# Altium PCB BearlyML Carrier Arty Board.pcbdoc
Units mil, origin at the board's own origin, x right, y up, seen from the top; angles counter-clockwise.
Board outline 7614.16 x 3519.68 mil, 4 copper layers (Top Layer, Mid-Layer 1, Mid-Layer 2, Bottom Layer); 42 components, 72 nets, 458 pads, 129 vias.
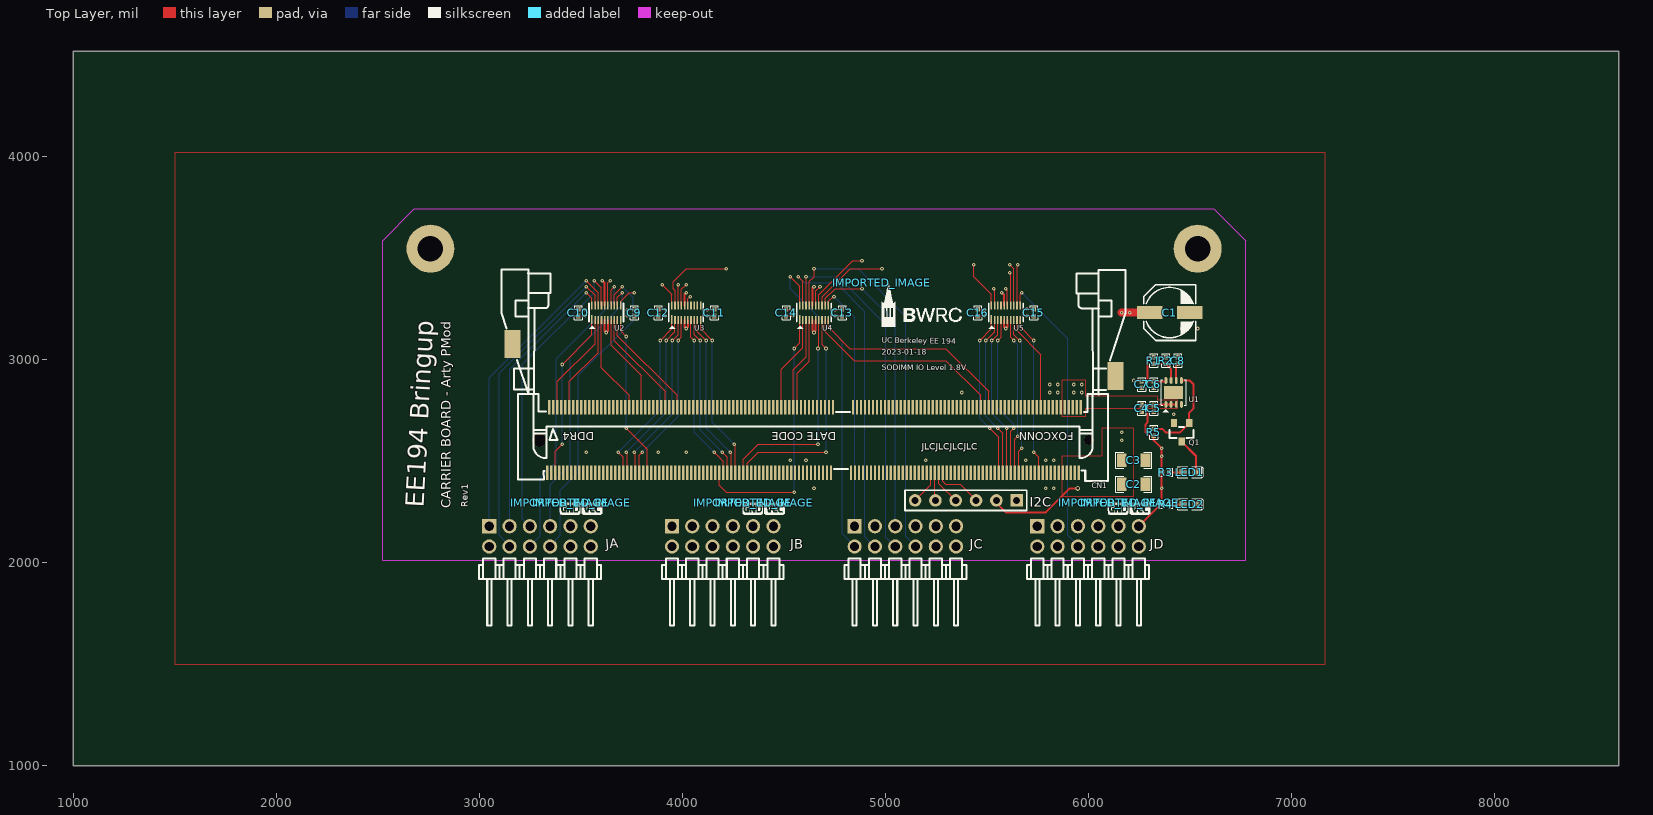
[diagram p0: Top Layer view]
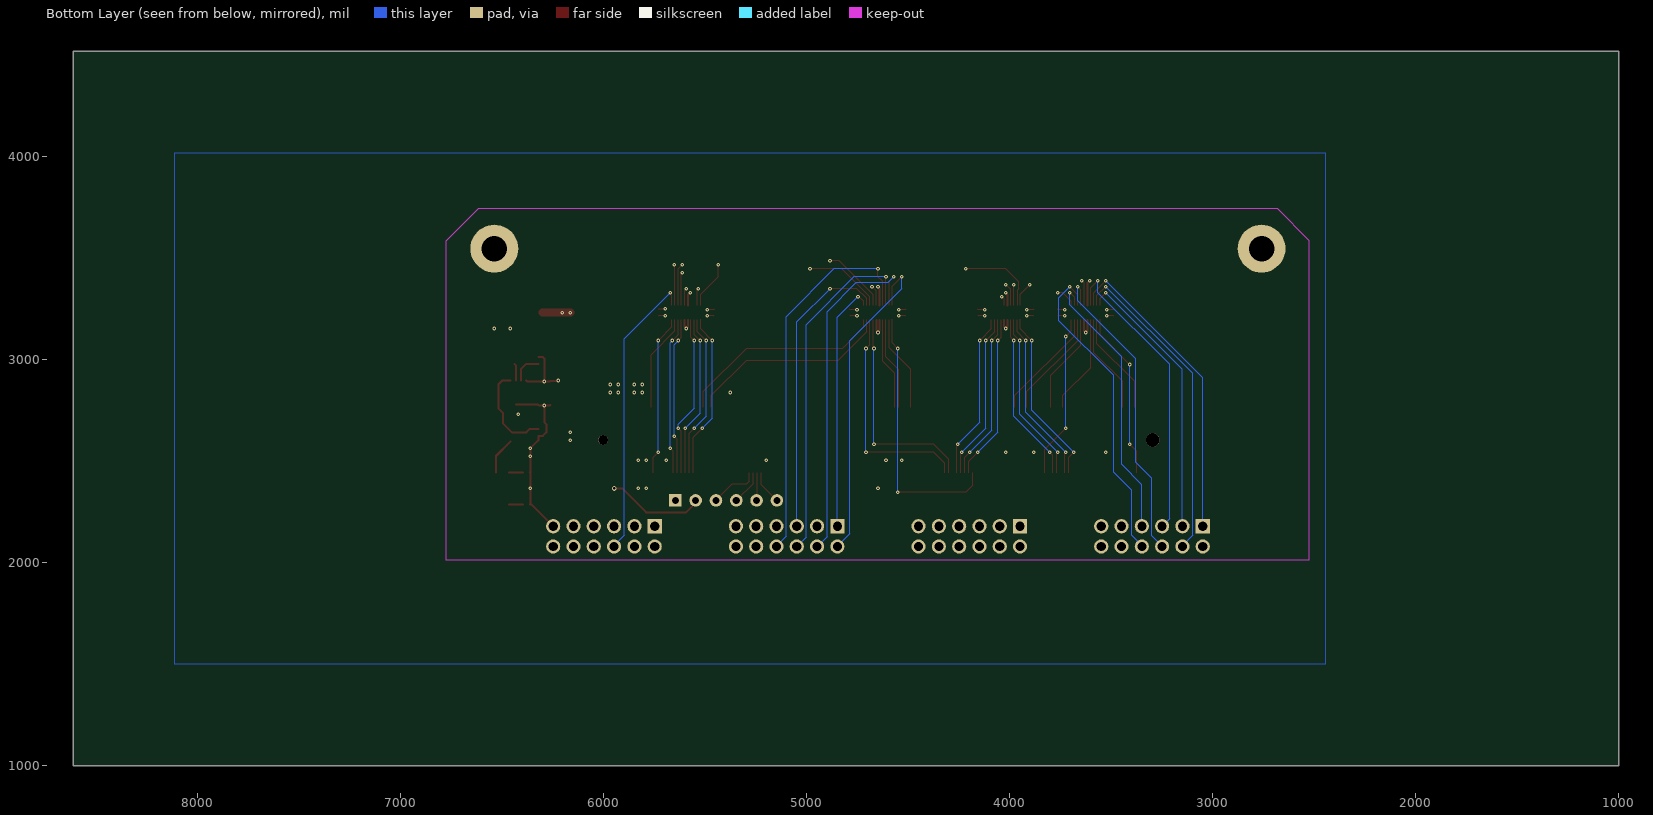
[diagram p1: Bottom Layer view, seen from below]
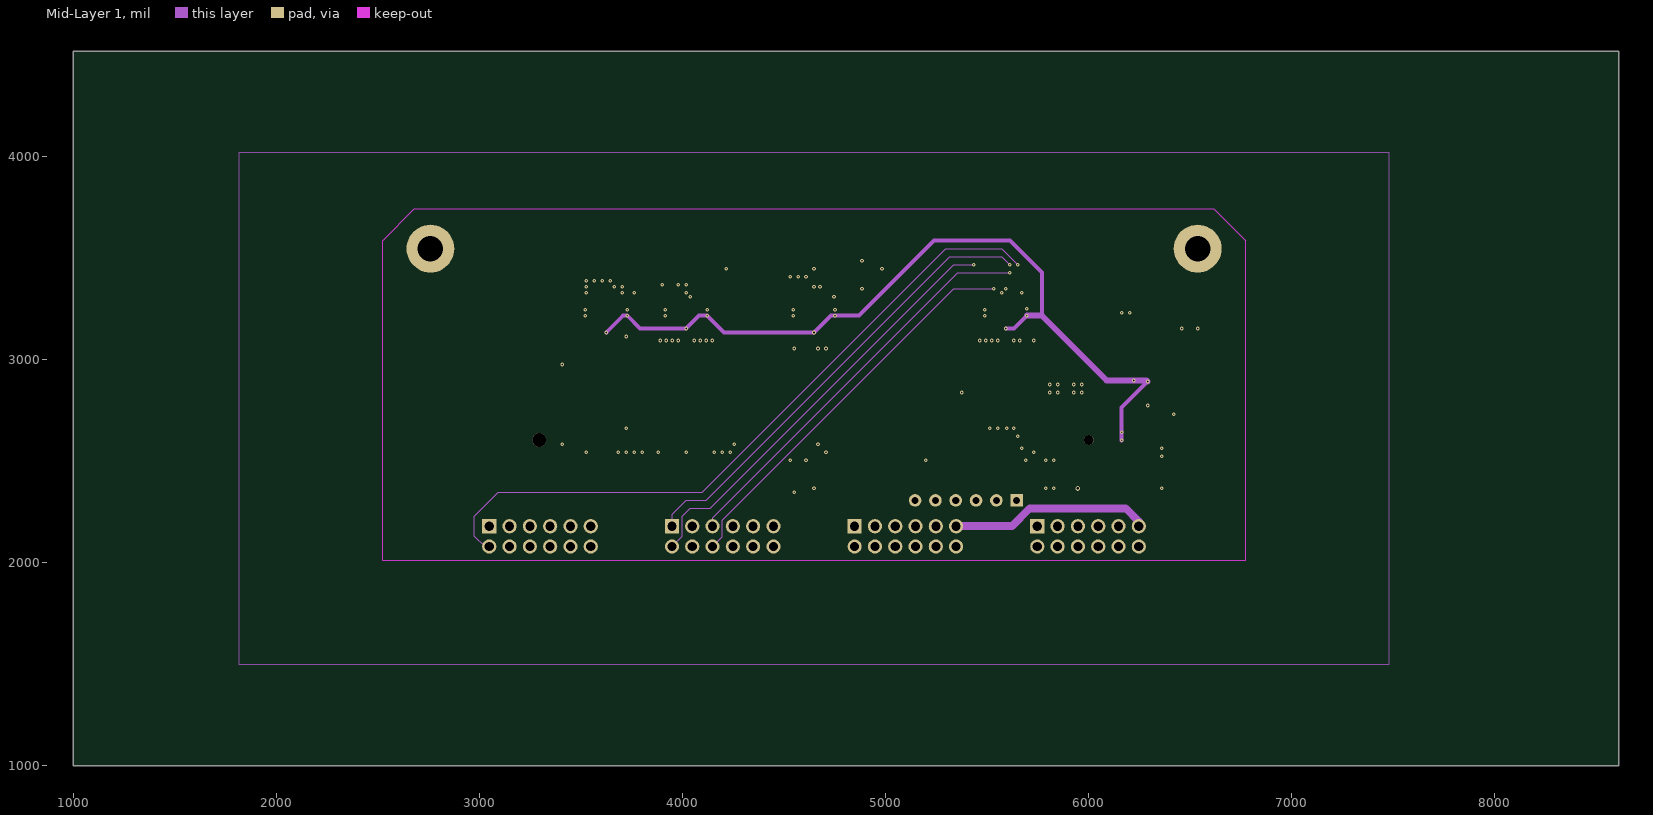
[diagram p2: Mid-Layer 1]
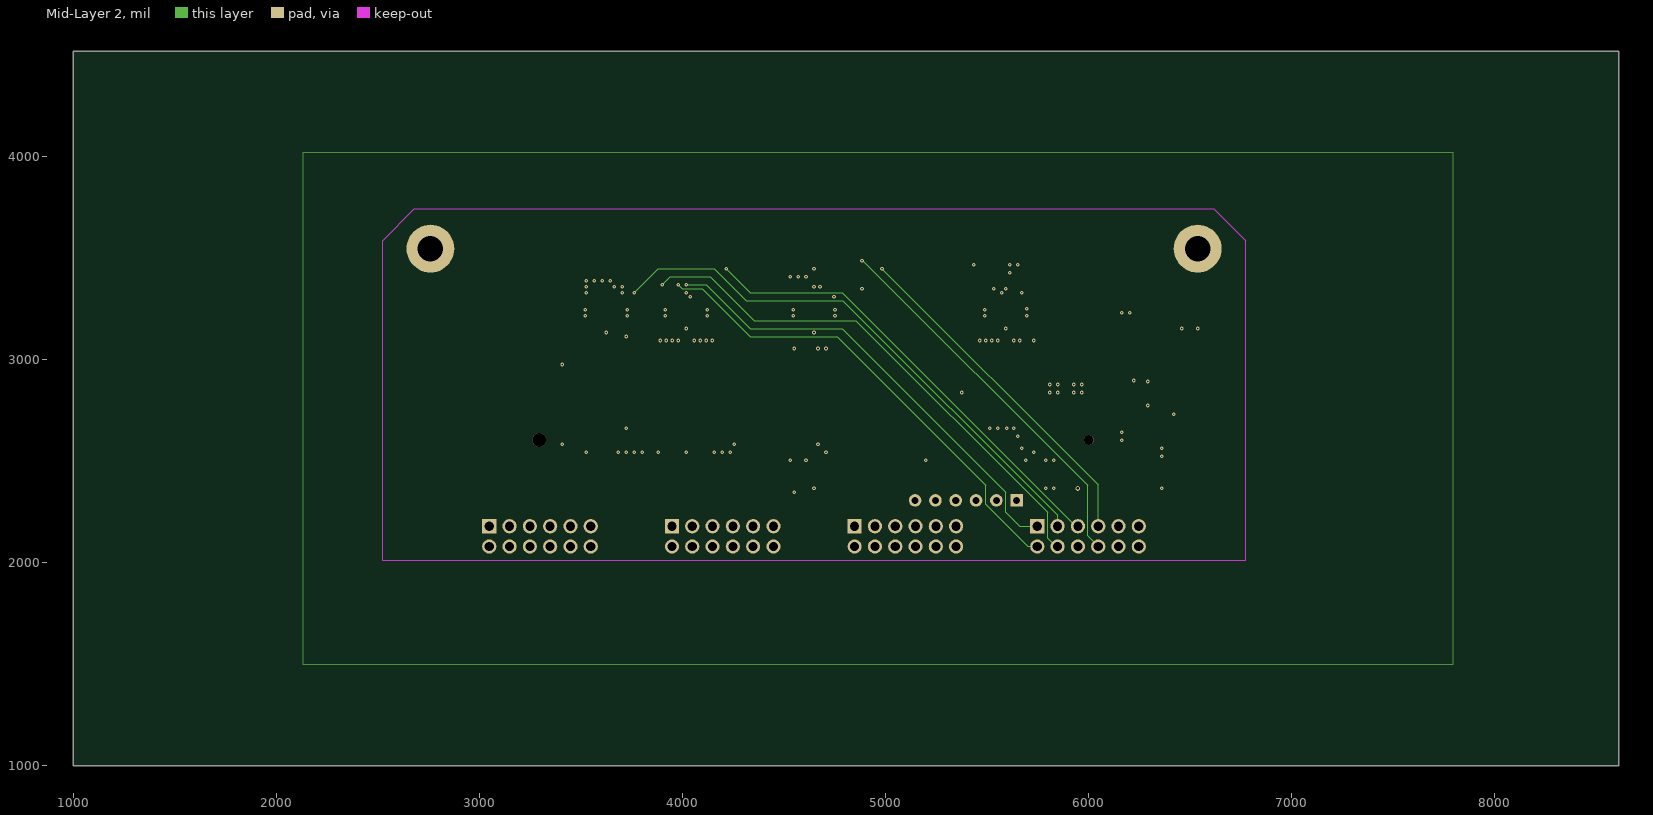
[diagram p3: Mid-Layer 2]

## Layer stack, top to bottom
Top Solder: solder mask 0.4, Solder Resist, Dk 3.5
Top Layer: signal copper 1.4
Dielectric1: dielectric 12.6, FR-4, Dk 4.8
Mid-Layer 1: signal copper 1.4
Dielectric3: dielectric 12.6, FR-4, Dk 4.8
Mid-Layer 2: signal copper 1.4
Dielectric2: dielectric 12.6, FR-4, Dk 4.8
Bottom Layer: signal copper 1.4
Bottom Solder: solder mask 0.4, Solder Resist, Dk 3.5

## Board outline
8614.16,1000 1000,1000 1000,4519.68 8614.16,4519.68

## Design rules (kind name [scope] priority, off if disabled: settings)
Clearance [All] p1: gap=10 ignorepadtopadclearanceinfootprint=FALSE except(0: Arc-Hole Track-Hole SMDPad-Hole THPad-Hole Via-Hole Fill-Hole Poly-Hole Region-Hole Text-Hole)
PolygonConnect [All] p1: connectstyle=Relief reliefconductorwidth=10 reliefentries=4 polygonreliefangle="90 Angle" airgapwidth=10
RoutingVias [All] p1: holewidth=28 width=50 viastyle="Through Hole" minholewidth=28 minwidth=50 maxholewidth=28 maxwidth=50
SolderMaskExpansion [All] p1: expansion=4 istentingtop=FALSE
Width [All] p1: maxlimit=10 minlimit=10 preferedwidth=10
30 further rules are at their usual default settings.

## Components (designator, comment, footprint, x,y, rotation, side; value= is the part's Value field where it differs from the comment)
C1 "220u" CAPPR5.0-D6.3_L6.6_W6.6 6401.6,3232.32 r180 top
C2 "22u" CAPA-1206 6224.4,2385.82 r180 top
C3 "22u" CAPA-1206 6224.4,2503.92 r180 top
C4 "10u" CAPA-0402 6263.8,2759.82 r90 top
C5 "100n" CAPA-0402 6322.8,2759.82 r90 top
C6 "100n" CAPA-0402 6322.8,2877.92 r90 top
C7 "10u" CAPA-0402 6263.8,2877.92 r90 top
C8 "1n" CAPA-0402 6440.9,2996.02 r270 top
C9 "100n" CAPA-0402 3763.8,3232.32 r270 top
C10 "100n" CAPA-0402 3488.2,3232.32 r90 top
C11 "100n" CAPA-0402 4157.5,3232.32 r270 top
C12 "100n" CAPA-0402 3881.9,3232.32 r90 top
C13 "100n" CAPA-0402 4787.4,3232.28 r270 top
C14 "100n" CAPA-0402 4511.81,3232.28 r90 top
C15 "100n" CAPA-0402 5732.27,3232.28 r270 top
C16 "100n" CAPA-0402 5456.69,3232.28 r90 top
CN1 "ASAA826-E8SB0-7H" CONN-SMD_ASAA826-E8SB0-7H 4649.58,2759.86 r180 top
I2C "HDR-M-2.54_1x6" HDR-M-2.54_1X6 5397.63,2307.09 r180 top
IMPORTED_IMAGE "Comment" IMPORTED_IMAGE 4984.25,3379.91 r0 top
IMPORTED_IMAGE "Comment" IMPORTED_IMAGE 3397.71,2295.02 r0 top
IMPORTED_IMAGE "Comment" IMPORTED_IMAGE 3504.79,2294.58 r0 top
IMPORTED_IMAGE "Comment" IMPORTED_IMAGE 4297.71,2295.02 r0 top
IMPORTED_IMAGE "Comment" IMPORTED_IMAGE 4404.79,2294.58 r0 top
IMPORTED_IMAGE "Comment" IMPORTED_IMAGE 6097.71,2295.02 r0 top
IMPORTED_IMAGE "Comment" IMPORTED_IMAGE 6204.79,2294.58 r0 top
JA "A2541WR-2X6P" CONN-TH_A2541WR-2X6P 3299.6,2129.72 r180 top
JB "A2541WR-2X6P" CONN-TH_A2541WR-2X6P 4199.6,2129.72 r180 top
JC "A2541WR-2X6P" CONN-TH_A2541WR-2X6P 5099.6,2129.72 r180 top
JD "A2541WR-2X6P" CONN-TH_A2541WR-2X6P 5999.6,2129.72 r180 top
LED1 "LED-0603_R" LED-0603 6499.99,2444.88 r0 top
LED2 "LED-0603_R" LED-0603 6499.99,2287.4 r0 top
Q1 "FDV301N" SOT-23_L2.9-W1.3-P1.90-LS2.4-BR 6460.62,2641.73 r90 top
R1 "160k" RES-0402 6322.8,2996.02 r90 top
R2 "47k" RES-0402 6381.9,2996.02 r270 top
R3 "2k" RES-0402 6381.9,2444.92 r180 top
R4 "2k" RES-0402 6381.9,2287.42 r180 top
R5 "10k" RES-0402 6322.8,2641.72 r270 top
U1 "MCP1726-ADJE/MF" TDFN-8_L3.0-W3.0-P0.65-BL-EP 6421.3,2838.62 r0 top
U2 "TXB0108DQSR" SON-20_L4.0-W2.0-P0.40-BL 3625.97,3232.26 r0 top
U3 "TXB0108DQSR" SON-20_L4.0-W2.0-P0.40-BL 4019.66,3232.26 r0 top
U4 "TXB0108DQSR" SON-20_L4.0-W2.0-P0.40-BL 4649.56,3232.26 r0 top
U5 "TXB0108DQSR" SON-20_L4.0-W2.0-P0.40-BL 5594.47,3232.26 r0 top

## Footprints (in the part's own frame and the unit in brackets; to place one, negate y for a bottom-side part, rotate by r counter-clockwise, add the part's x,y. Pads: shape width x height; smd on the part's side, far side on the other; paste and mask are expansions set on the pad)
CAPA-0402 [mm]
  rect 0.566x0.54 smd paste-100 mask+0.051: 1(-0.433,0) 2(0.433,0)
  silkscreen extent -0.87,-0.5 0.87,0.5
CAPA-1206 [mil]
  rect 47.54x66.97 smd paste-3937.01 mask+2: 1(-58.22,0) 2(58.22,0)
  silkscreen extent -89,-39 89,39
CAPPR5.0-D6.3_L6.6_W6.6 [mm]
  rect 3.2x1.6 smd paste+0 mask+0.102: 1(2.5,0) 2(-2.5,0)
  silkscreen extent -3.25,-3.5 3.25,3.5
CONN-SMD_ASAA826-E8SB0-7H [mm]
  rect 0.3x1.8 smd paste+0 mask+0.051: 1(33.375,8.05) 2(33.125,-0.15) 3(32.875,8.05) 4(32.625,-0.15) 5(32.375,8.05) 6(32.125,-0.15) 7(31.875,8.05) 8(31.625,-0.15) 9(31.375,8.05) 10(31.125,-0.15) 11(30.875,8.05) 12(30.625,-0.15) 13(30.375,8.05) 14(30.125,-0.15) 15(29.875,8.05) 16(29.625,-0.15) 17(29.375,8.05) 18(29.125,-0.15) 19(28.875,8.05) 20(28.625,-0.15) 21(28.375,8.05) 22(28.125,-0.15) 23(27.875,8.05) 24(27.625,-0.15) 25(27.375,8.05) 26(27.125,-0.15) 27(26.875,8.05) 28(26.625,-0.15) 29(26.375,8.05) 30(26.125,-0.15) 31(25.875,8.05) 32(25.625,-0.15) 33(25.375,8.05) 34(25.125,-0.15) 35(24.875,8.05) 36(24.625,-0.15) 37(24.375,8.05) 38(24.125,-0.15) 39(23.875,8.05) 40(23.625,-0.15) 41(23.375,8.05) 42(23.125,-0.15) 43(22.875,8.05) 44(22.625,-0.15) 45(22.375,8.05) 46(22.125,-0.15) 47(21.875,8.05) 48(21.625,-0.15) 49(21.375,8.05) 50(21.125,-0.15) 51(20.875,8.05) 52(20.625,-0.15) 53(20.375,8.05) 54(20.125,-0.15) 55(19.875,8.05) 56(19.625,-0.15) 57(19.375,8.05) 58(19.125,-0.15) 59(18.875,8.05) 60(18.625,-0.15) 61(18.375,8.05) 62(18.125,-0.15) 63(17.875,8.05) 64(17.625,-0.15) 65(17.375,8.05) 66(17.125,-0.15) 67(16.875,8.05) 68(16.625,-0.15) 69(16.375,8.05) 70(16.125,-0.15) 71(15.875,8.05) 72(15.625,-0.15) 73(15.375,8.05) 74(15.125,-0.15) 75(14.875,8.05) 76(14.625,-0.15) 77(14.375,8.05) 78(14.125,-0.15) 79(13.875,8.05) 80(13.625,-0.15) 81(13.375,8.05) 82(13.125,-0.15) 83(12.875,8.05) 84(12.625,-0.15) 85(12.375,8.05) 86(12.125,-0.15) 87(11.875,8.05) 88(11.625,-0.15) 89(11.375,8.05) 90(11.125,-0.15) 91(10.875,8.05) 92(10.625,-0.15) 93(10.375,8.05) 94(10.125,-0.15) 95(9.875,8.05) 96(9.625,-0.15) 97(9.375,8.05) 98(9.125,-0.15) 99(8.875,8.05) 100(8.625,-0.15) 101(8.375,8.05) 102(8.125,-0.15) 103(7.875,8.05) 104(7.625,-0.15) 105(7.375,8.05) 106(7.125,-0.15) 107(6.875,8.05) 108(6.625,-0.15) 109(6.375,8.05) 110(6.125,-0.15) 111(5.875,8.05) 112(5.625,-0.15) 113(5.375,8.05) 114(5.125,-0.15) 115(4.875,8.05) 116(4.625,-0.15) 117(4.375,8.05) 118(4.125,-0.15) 119(3.875,8.05) 120(3.625,-0.15) 121(3.375,8.05) 122(3.125,-0.15) 123(2.875,8.05) 124(2.625,-0.15) 125(2.375,8.05) 126(2.125,-0.15) 127(1.875,8.05) 128(1.625,-0.15) 129(1.375,8.05) 130(1.125,-0.15) 131(0.875,8.05) 132(0.625,-0.15) 133(0.375,8.05) 134(0.125,-0.15) 135(-0.125,8.05) 136(-0.375,-0.15) 137(-0.625,8.05) 138(-0.875,-0.15) 139(-1.125,8.05) 140(-1.375,-0.15) 141(-1.625,8.05) 142(-1.875,-0.15) 143(-2.125,8.05) 144(-2.375,-0.15) 145(-4.625,8.05) 146(-4.875,-0.15) 147(-5.125,8.05) 148(-5.375,-0.15) 149(-5.625,8.05) 150(-5.875,-0.15) 151(-6.125,8.05) 152(-6.375,-0.15) 153(-6.625,8.05) 154(-6.875,-0.15) 155(-7.125,8.05) 156(-7.375,-0.15) 157(-7.625,8.05) 158(-7.875,-0.15) 159(-8.125,8.05) 160(-8.375,-0.15) 161(-8.625,8.05) 162(-8.875,-0.15) 163(-9.125,8.05) 164(-9.375,-0.15) 165(-9.625,8.05) 166(-9.875,-0.15) 167(-10.125,8.05) 168(-10.375,-0.15) 169(-10.625,8.05) 170(-10.875,-0.15) 171(-11.125,8.05) 172(-11.375,-0.15) 173(-11.625,8.05) 174(-11.875,-0.15) 175(-12.125,8.05) 176(-12.375,-0.15) 177(-12.625,8.05) 178(-12.875,-0.15) 179(-13.125,8.05) 180(-13.375,-0.15) 181(-13.625,8.05) 182(-13.875,-0.15) 183(-14.125,8.05) 184(-14.375,-0.15) 185(-14.625,8.05) 186(-14.875,-0.15) 187(-15.125,8.05) 188(-15.375,-0.15) 189(-15.625,8.05) 190(-15.875,-0.15) 191(-16.125,8.05) 192(-16.375,-0.15) 193(-16.625,8.05) 194(-16.875,-0.15) 195(-17.125,8.05) 196(-17.375,-0.15) 197(-17.625,8.05) 198(-17.875,-0.15) 199(-18.125,8.05) 200(-18.375,-0.15) 201(-18.625,8.05) 202(-18.875,-0.15) 203(-19.125,8.05) 204(-19.375,-0.15) 205(-19.625,8.05) 206(-19.875,-0.15) 207(-20.125,8.05) 208(-20.375,-0.15) 209(-20.625,8.05) 210(-20.875,-0.15) 211(-21.125,8.05) 212(-21.375,-0.15) 213(-21.625,8.05) 214(-21.875,-0.15) 215(-22.125,8.05) 216(-22.375,-0.15) 217(-22.625,8.05) 218(-22.875,-0.15) 219(-23.125,8.05) 220(-23.375,-0.15) 221(-23.625,8.05) 222(-23.875,-0.15) 223(-24.125,8.05) 224(-24.375,-0.15) 225(-24.625,8.05) 226(-24.875,-0.15) 227(-25.125,8.05) 228(-25.375,-0.15) 229(-25.625,8.05) 230(-25.875,-0.15) 231(-26.125,8.05) 232(-26.375,-0.15) 233(-26.625,8.05) 234(-26.875,-0.15) 235(-27.125,8.05) 236(-27.375,-0.15) 237(-27.625,8.05) 238(-27.875,-0.15) 239(-28.125,8.05) 240(-28.375,-0.15) 241(-28.625,8.05) 242(-28.875,-0.15) 243(-29.125,8.05) 244(-29.375,-0.15) 245(-29.625,8.05) 246(-29.875,-0.15) 247(-30.125,8.05) 248(-30.375,-0.15) 249(-30.625,8.05) 250(-30.875,-0.15) 251(-31.125,8.05) 252(-31.375,-0.15) 253(-31.625,8.05) 254(-31.875,-0.15) 255(-32.125,8.05) 256(-32.375,-0.15) 257(-32.625,8.05) 258(-32.875,-0.15) 259(-33.125,8.05) 260(-33.375,-0.15)
  rect 2x3.5 smd paste+0 mask+0.051: 261(37.75,-8.05) 262(-37.75,-4.05)
  round 1.2 hole 1.2 unplated paste+0: ""(-34.4,3.95)
  round 1.7 hole 1.7 unplated paste+0: ""(34.4,3.95)
  silkscreen extent -38.98,-17.38 39.11,9.05
CONN-TH_A2541WR-2X6P [mil]
  rect 70x70 hole 45 paste+0 mask+2: 1(250,-50)
  round 70 hole 45 paste+0 mask+2: 2(250,50) 3(150,-50) 4(150,50) 5(50,-50) 6(50,50) 7(-50,-50) 8(-50,50) 9(-150,-50) 10(-150,50) 11(-250,-50) 12(-250,50)
  silkscreen extent -300,110 300,440
HDR-M-2.54_1X6 [mil]
  rect 62x62 hole 35 paste+0 mask+2: 1(-250,0)
  round 62 hole 35 paste+0 mask+2: 2(-150,0) 3(-50,0) 4(50,0) 5(150,0) 6(250,0)
  silkscreen extent -300,-50 300,50
IMPORTED_IMAGE [mil]
  silkscreen extent 0,-217 394,0
LED-0603 [mm]
  rect 0.9x0.8 smd paste+0 mask+0.102: 1(-0.8,0) 2(0.8,0)
  silkscreen extent -1.51,-0.69 1.7,0.69
RES-0402 [mm]
  rect 0.566x0.54 smd paste-100 mask+0.051: 1(-0.433,0) 2(0.433,0)
  silkscreen extent -0.87,-0.5 0.87,0.5
SON-20_L4.0-W2.0-P0.40-BL [mm]
  rect 0.2x1.1 smd paste+0 mask+0.051: 1(-1.8,-0.85)
  rect 0.2x1 smd paste+0 mask+0.051: 2(-1.4,-0.9) 3(-1,-0.9) 4(-0.6,-0.9) 5(-0.2,-0.9) 6(0.2,-0.9) 7(0.6,-0.9) 8(1,-0.9) 9(1.4,-0.9) 10(1.8,-0.9) 11(1.8,0.9) 12(1.4,0.9) 13(1,0.9) 14(0.6,0.9) 15(0.2,0.9) 16(-0.2,0.9) 17(-0.6,0.9) 18(-1,0.9) 19(-1.4,0.9) 20(-1.8,0.9)
  silkscreen extent -2.16,-2 2.16,1.14
SOT-23_L2.9-W1.3-P1.90-LS2.4-BR [mm]
  rect 1x0.8 smd paste+0 mask+0.051: 1(1.15,-0.95) 2(1.15,0.95) 3(-1.15,0)
  silkscreen extent -0.7,-1.5 0.7,1.5
TDFN-8_L3.0-W3.0-P0.65-BL-EP [mm]
  oval 0.35x0.84 smd paste+0 mask+0.051: 1(-0.975,-1.495) 2(-0.325,-1.495) 3(0.325,-1.495) 4(0.975,-1.495) 5(0.975,1.495) 6(0.325,1.495) 7(-0.325,1.495) 8(-0.975,1.495)
  rect 2.4x1.6 smd paste+0 mask+0.051: 9(0,0)
  silkscreen extent -1.58,-2.5 1.58,1.58

## Free pads (board coordinates)
  round 236.22 hole 125.98 paste+0 mask+2: 2(2759.84,3547.24) 2(6539.35,3547.24)

## Via types
v1: diameter 17.72, hole 7.87, Top Layer to Bottom Layer, 128 vias
v2: diameter 24, hole 12, Top Layer to Bottom Layer, 1 vias

## Nets (pads, with @x,y where several pads share a name; then routed paths per layer and width w, separated by ;. In a path a pad name is that pad's centre, name@x,y a point inside that pad or via, vN(x,y) a via of type N, cw(c..) or ccw(c..) an arc to the next point about the centre after c; other vN are vias at no path point)
1V8: C2.2 C3.2 C6.2 C7.2 C9.2 C11.2 C13.2 C15.2 CN1.251 CN1.253 CN1.255 CN1.257 CN1.259 I2C.2 R1.2 U1.8 U2.5 U2.6 U3.5 U3.6 U4.5 U4.6 U5.5 U5.6 | length 5392.1
  Top Layer w5.91: v1(3729.33,3217.52) 3761.49,3217.52 C9.2@3763.77,3215.24 ; v1(4123.03,3217.52) 4155.19,3217.52 C11.2@4157.47,3215.24 ; v1(4752.95,3217.52) 4785.11,3217.52 C13.2 ; v1(5697.83,3217.52) 5729.99,3217.52 C15.2
  Top Layer w9.84: U2.5 3618.11,3141.72 3625.98,3133.86 3633.86,3141.74 U2.6@3633.86,3196.84 ; U3.5 4011.81,3161.41 v1(4019.68,3153.54) 4027.56,3161.42 U3.6@4027.56,3196.84 ; U4.5 4641.73,3141.72 4649.6,3133.86 4657.48,3141.74 U4.6@4657.48,3196.84 ; I2C.2 5547.6,2294.92 5594.5,2248.02 5791.3,2248.02 5909.4,2366.12 v2(5948.81,2366.14) ; U5.5 5586.61,3161.41 v1(5594.48,3153.54) 5602.35,3161.41 U5.6@5602.35,3196.84 ; v1(6224.4,2897.63) 6227.05,2894.99 C7.2 6266.05,2892.71 v1(6293.3,2892.71) ; R1.2 6300.49,3013.1 6293.3,3005.91 v1(6293.3,2892.71) ; U1.8@6382.87,2897.43 6378.14,2892.71 v1(6293.3,2892.71)
  Mid-Layer 1 w19.68: v1@3625.98,3133.86 3709.64,3217.52 v1(3729.33,3217.52) 3793.3,3153.54 v1(4019.68,3153.54) 4083.66,3217.52 v1(4123.03,3217.52) 4206.69,3133.86 4649.6,3133.86 4733.26,3217.52 v1@4752.95,3217.52 ; v1@4752.9,3217.52 4871.1,3217.52 5240.1,3586.62 5614.2,3586.62 5771.6,3429.12 5771.6,3217.52 v1(5697.83,3217.52) ; v1(5594.48,3153.54) 5633.85,3153.54 v1(5697.83,3217.52) ; v1(6165.34,2602.36) v1(6165.34,2641.73) 6165.35,2764.76 v1(6293.3,2892.71)
  Mid-Layer 1 w29.53: v1(5697.83,3217.52) 5771.6,3217.52 6091.49,2897.63 v1(6224.4,2897.63) 6288.38,2897.63 v1(6293.3,2892.71)
  other v1: 3625.98,3133.85 4649.6,3133.85
3V3: C1.1 C4.2 C5.2 C10.2 C12.2 C14.2 C16.2 CN1.252 CN1.254 CN1.256 CN1.258 CN1.260 JA.11 JA.12 JB.11 JB.12 JC.11 JC.12 JD.11 JD.12 R3.2 R4.2 R5.2 U1.1 U1.2 U1.3 U2.16 U3.16 U4.16 U5.16 | length 2495.8
  Top Layer w5.91: C10.2@3488.19,3249.32 3490.47,3247.04 v1(3522.63,3247.04) ; C12.2@3881.89,3249.32 3884.17,3247.04 v1(3916.33,3247.04) ; C14.2 4514.09,3247.04 v1(4546.25,3247.04) ; C16.2 5458.97,3247.04 v1(5491.13,3247.04)
  Top Layer w9.84: v1(3606.3,3389.76) 3618.11,3377.95 U2.16 ; U3.16 4011.81,3322.83 v1(4019.68,3330.7) ; U4.16 4641.73,3352.36 v1(4649.6,3360.23) ; v1(5574.8,3330.7) 5586.61,3318.89 U5.16 ; JD.11@6249.6,2179.92 6357.08,2287.4 6364.84,2287.4 6362.2,2290.04 v1(6362.2,2366.14) 6362.2,2442.24 R3.2@6364.84,2444.88 ; C4.2 6266.05,2774.6 v1(6293.3,2774.6) ; R3.2@6364.8,2444.92 6362.2,2447.52 v1(6362.2,2523.62) v1(6362.2,2562.99) 6322.8,2602.42 R5.2 6300.49,2624.69 6283.45,2641.73 6283.45,2681.1 6293.3,2690.94 v1(6293.3,2774.6) ; U1.3@6434.06,2779.72 6325.66,2779.72 C5.2 6320.55,2774.6 v1(6293.3,2774.6)
  Top Layer w39.37: v1(6165.34,3232.28) C1.1@6303.13,3232.28
  Mid-Layer 1 w39.37: JC.11@5349.6,2179.92 5624.8,2179.92 5712.6,2267.72 6185,2267.72 6249.6,2203.12 JD.11@6249.6,2179.92
  other v1: 5929.13,2838.58 5968.5,2838.58 5929.13,2877.95 5968.5,2877.95 6204.71,3232.28
BOOT_SEL_1V8: CN1.240 U5.9 | length 479.6
  Top Layer w5.91: U5.9 5649.6,3142.72 5766.7,3025.62 CN1.240@5766.7,2765.72
BOOT_SEL_3V3: JA.2 U5.12 | length 3650.7
  Top Layer w5.91: U5.12 5649.6,3464.56 v1(5653.54,3468.5)
  Mid-Layer 1 w5.91: JA.2@3049.6,2079.92 3026.4,2079.92 2976.4,2129.92 2976.4,2228.32 3094.5,2346.42 4098.4,2346.42 5299.2,3547.22 5574.8,3547.22 v1(5653.54,3468.5)
C8_2: C8.2 U1.6 | length 84.4
  Top Layer w9.84: U1.6@6434.06,2897.43 6434.06,2972.14 C8.2
DEBUG_CLK_1V8: CN1.210 U4.9 | length 1013.9
  Top Layer w5.91: U4.9 4704.7,3137.82 4846.5,2996.02 5299.2,2996.02 5471.5,2823.82 CN1.210@5471.5,2765.72
DEBUG_CLK_3V3: JC.5 U4.12 | length 1473.9
  Top Layer w5.91: U4.12 4704.7,3302.12 4752.9,3350.42 v1(4885.82,3350.39)
  Bottom Layer w5.91: v1(4885.82,3350.39) 5049.6,3186.62 JC.5@5049.6,2179.92
GND: C1.2 C2.1 C3.1 C4.1 C5.1 C6.1 C7.1 C8.1 C9.1 C10.1 C11.1 C12.1 C13.1 C14.1 C15.1 C16.1 CN1.1 CN1.2 CN1.3 CN1.4 CN1.7 CN1.8 CN1.10 CN1.13 CN1.14 CN1.19 CN1.20 CN1.25 CN1.26 CN1.31 CN1.32 CN1.37 CN1.38 CN1.40 CN1.43 CN1.44 CN1.46 CN1.49 CN1.50 CN1.55 CN1.56 CN1.58 CN1.61 CN1.62 CN1.64 CN1.67 CN1.68 CN1.73 CN1.74 CN1.79 CN1.80 CN1.85 CN1.86 CN1.102 CN1.107 CN1.113 CN1.119 CN1.125 CN1.129 CN1.132 CN1.135 CN1.138 CN1.141 CN1.144 CN1.146 CN1.147 CN1.152 CN1.153 CN1.158 CN1.159 CN1.164 CN1.165 CN1.170 CN1.171 CN1.176 CN1.177 CN1.200 CN1.201 CN1.217 CN1.231 CN1.241 CN1.242 CN1.243 CN1.244 CN1.245 CN1.246 CN1.247 CN1.248 CN1.249 CN1.250 CN1.261 CN1.262 I2C.1 JA.9 JA.10 JB.9 JB.10 JC.9 JC.10 JD.9 JD.10 LED2.2 pad.2 Q1.2 R2.1 U1.4 U1.9 U2.15 U3.15 U4.15 U5.15 | length 645.8
  Top Layer w5.91: C10.1@3488.19,3215.24 3490.47,3217.52 v1(3522.63,3217.52) ; U2.15@3633.86,3267.71 3633.86,3377.95 v1(3645.67,3389.76) ; v1(3729.33,3247.04) 3761.49,3247.04 C9.1@3763.77,3249.32 ; C12.1@3881.89,3215.24 3884.17,3217.52 v1(3916.33,3217.52) ; U3.15@4027.56,3267.71 4027.56,3299.22 v1(4039.37,3311.02) ; v1(4123.03,3247.04) 4155.19,3247.04 C11.1@4157.47,3249.32 ; C14.1 4514.09,3217.52 v1(4546.25,3217.52) ; U4.15@4657.48,3267.71 4657.48,3338.58 v1(4679.13,3360.23) ; v1(4752.95,3247.04) 4785.11,3247.04 C13.1 ; C16.1 5458.97,3217.52 v1(5491.13,3217.52) ; v1(5594.48,3350.39) 5602.35,3342.52 U5.15@5602.35,3267.71 ; v1(5697.83,3251.96) 5700.47,3249.32 C15.1
  other v1: 4649.6,2366.14 5791.33,2366.14 5830.7,2366.14 4531.49,2503.93 4610.23,2503.93 5200.78,2503.93 5692.91,2503.93 5791.33,2503.93 5830.7,2503.93 3527.56,2543.3 3881.89,2543.3 4019.68,2543.3 6421.25,2730.31 5377.95,2838.58 5811.01,2838.58 5850.38,2838.58 5811.01,2877.95 5850.38,2877.95 6460.62,3153.54 6539.36,3153.54
GPIO_PA0_1V8: CN1.87 U4.1 | length 1309.1
  Top Layer w5.91: CN1.87 4182.1,2380.92 4216.57,2346.45 v1(4551.18,2346.45) ; v1(4551.18,3055.11) 4578.74,3082.67 U4.1
  Bottom Layer w5.91: v1(4551.18,2346.45) v1(4551.18,3055.11)
GPIO_PA0_3V3: JC.2 U4.20 | length 1622.6
  Top Layer w5.91: v1(4531.49,3409.44) 4578.74,3362.19 U4.20
  Bottom Layer w5.91: v1(4531.49,3409.44) 4531.5,3350.42 4787.4,3094.52 4787.4,2142.12 JC.2@4849.6,2079.92
GPIO_PA1_1V8: CN1.118 U4.2 | length 475.6
  Top Layer w5.91: CN1.118@4487.2,2765.72 4487.2,2951.82 4594.5,3059.02 U4.2@4594.5,3196.82
GPIO_PA1_3V3: JC.4 U4.19 | length 1730.1
  Top Layer w5.91: v1(4570.86,3409.44) 4594.48,3385.82 U4.19@4594.48,3267.7
  Bottom Layer w5.91: v1(4570.86,3409.44) 4600.4,3379.92 4757.9,3379.92 4900.6,3237.22 4900.6,2128.92 JC.4@4949.6,2079.92
GPIO_PA2_1V8: CN1.124 U4.3 | length 457.5
  Top Layer w5.91: CN1.124@4546.3,2765.72 4546.3,2951.72 4610.2,3015.72 U4.3
GPIO_PA2_3V3: JC.6 U4.18 | length 1745.5
  Top Layer w5.91: U4.18 v1(4610.23,3409.44)
  Bottom Layer w5.91: v1(4610.23,3409.44) 4767.7,3409.42 5003.9,3173.22 5003.9,2125.62 JC.6@5049.6,2079.92
GPIO_PA3_1V8: CN1.126 U4.4 | length 456
  Top Layer w5.91: CN1.126@4565.9,2765.72 4565.9,2932.12 4626,2992.12 U4.4@4626,3196.82
GPIO_PA3_3V3: JC.8 U4.17 | length 1893
  Top Layer w5.91: U4.17@4626,3267.72 4626,3385.82 4649.6,3409.42 v1(4649.6,3448.81)
  Bottom Layer w5.91: v1(4649.6,3448.81) 4866.21,3448.81 5102.4,3212.62 5102.35,2129.92 JC.8@5149.6,2079.92
I2C0_SCL_1V8: CN1.185 I2C.6 | length 168
  Top Layer w5.91: I2C.6 5225.36,2384.81 CN1.185
I2C0_SDA_1V8: CN1.187 I2C.5 | length 136.9
  Top Layer w5.91: CN1.187@5245.05,2442.93 5245.05,2309.66 I2C.5
I2C1_SCL_1V8: CN1.189 I2C.4 | length 170.1
  Top Layer w5.91: CN1.189 5264.7,2390.02 I2C.4
I2C1_SDA_1V8: CN1.191 I2C.3 | length 244.3
  Top Layer w5.91: CN1.191 5284.42,2400.61 5299.2,2385.83 5368.88,2385.83 I2C.3
JTAG_TCK_1V8: CN1.41 U3.2 | length 855.4
  Top Layer w5.91: v1(3724.41,2543.3) 3729.31,2538.4 CN1.41 ; v1(3921.26,3094.48) 3964.56,3137.78 U3.2@3964.56,3196.84
  Bottom Layer w5.91: v1(3724.41,2543.3) 3921.26,2740.15 v1(3921.26,3094.48)
JTAG_TCK_3V3: JD.5 U3.19 | length 2666.8
  Top Layer w5.91: U3.19@3964.6,3267.72 3964.59,3341.51 3955.69,3350.4 3955.69,3384.81 4019.69,3448.81 v1(4216.53,3448.81)
  Mid-Layer 2 w5.91: v1(4216.53,3448.81) 4334.64,3330.7 4787.41,3330.7 5938.2,2179.92 JD.5@5949.6,2179.92
JTAG_TDI_1V8: CN1.45 U3.3 | length 845.7
  Top Layer w5.91: v1(3763.78,2543.3) 3768.69,2538.39 CN1.45 ; v1(3950.78,3094.48) 3980.31,3124.01 U3.3
  Bottom Layer w5.91: v1(3763.78,2543.3) 3950.78,2730.3 v1(3950.78,3094.48)
JTAG_TDI_3V3: JD.2 U3.18 | length 2460.8
  Top Layer w5.91: U3.18 v1(3980.31,3370.07)
  Mid-Layer 2 w5.91: v1@3980.3,3370.02 3999.9,3350.42 4098.4,3350.42 4334.6,3114.22 4762.8,3114.22 5496.1,2380.92 5496.1,2287.42 5703.5,2079.92 JD.2@5749.6,2079.92
JTAG_TDO_1V8: CN1.47 U3.4 | length 840
  Top Layer w5.91: CN1.47 3788.37,2528.52 v1(3803.15,2543.3) ; v1(3980.31,3094.48) 3996.06,3110.23 U3.4@3996.06,3196.84
  Bottom Layer w5.91: v1(3803.15,2543.3) 3980.31,2720.46 v1(3980.31,3094.48)
JTAG_TDO_3V3: JD.1 U3.17 | length 2392.6
  Top Layer w5.91: U3.17@3996.06,3267.71 3996.06,3346.45 v1(4019.68,3370.07)
  Mid-Layer 2 w5.91: v1@4019.7,3370.02 4118.1,3370.02 4334.6,3153.52 4787.4,3153.52 5594.5,2346.42 5594.5,2248.02 5662.6,2179.92 JD.1@5749.6,2179.92
JTAG_TMS_1V8: CN1.39 U3.1 | length 875.3
  Top Layer w5.91: v1(3685.04,2543.3) 3709.63,2518.71 CN1.39 ; v1(3891.73,3094.48) 3948.82,3151.57 U3.1
  Bottom Layer w5.91: v1(3685.04,2543.3) 3891.73,2749.99 v1(3891.73,3094.48)
JTAG_TMS_3V3: JD.4 U3.20 | length 2711.9
  Top Layer w5.91: v1(3901.57,3370.07) 3948.82,3322.82 U3.20
  Mid-Layer 2 w5.91: v1@3901.6,3370.02 3940.9,3409.42 4137.8,3409.42 4354.3,3192.92 4856.3,3192.92 5801.2,2248.02 5801.2,2120.12 5841.3,2079.92 JD.4@5849.6,2079.92
JTAG_TRST_1V8: CN1.51 U2.10 | length 808.1
  Top Layer w5.91: U2.10@3696.85,3196.84 3696.85,3141.73 v1(3724.41,3114.17) ; v1(3724.41,2661.41) 3827.74,2558.08 CN1.51
  Bottom Layer w5.91: v1(3724.41,2661.41) v1(3724.41,3114.17)
JTAG_TRST_3V3: JD.3 U2.11 | length 2797.1
  Top Layer w5.91: U2.11@3696.9,3267.72 3696.9,3288.42 3739.2,3330.72 v1(3763.78,3330.7)
  Mid-Layer 2 w5.91: v1(3763.78,3330.7) 3881.9,3448.82 4157.5,3448.82 4315,3291.32 4792.3,3291.32 5849.6,2234.02 JD.3@5849.6,2179.92
LED1_1: LED1.1 R3.1 | length 69.6
  Top Layer w9.84: R3.1 LED1.1
LED1_2: LED1.2 Q1.3 | length 180.9
  Top Layer w9.84: Q1.3@6460.62,2596.45 6531.49,2525.58 LED1.2
LED2_1: LED2.1 R4.1 | length 69.6
  Top Layer w9.84: R4.1 LED2.1
QSPI0_CS_1V8: CN1.227 U5.7 | length 774.7
  Top Layer w5.91: U5.7 5618.1,3110.23 v1(5633.85,3094.48) ; CN1.227 5638.77,2607.27 v1(5653.54,2622.04)
  Bottom Layer w5.91: v1(5633.85,3094.48) 5653.54,3074.79 v1(5653.54,2622.04)
QSPI0_CS_3V3: JB.5 U5.14 | length 2168.8
  Top Layer w5.91: v1(5614.17,3429.13) 5618.1,3425.2 U5.14
  Mid-Layer 1 w5.91: JB.5@4149.6,2179.92 4149.6,2220.47 5358.26,3429.13 v1(5614.17,3429.13)
QSPI0_DQ0_1V8: CN1.219 U5.1 | length 818.2
  Top Layer w5.91: v1(5466.53,3094.48) 5523.62,3151.57 U5.1 ; v1(5515.74,2661.41) 5560.03,2617.12 CN1.219
  Bottom Layer w5.91: v1(5466.53,3094.48) 5466.53,2710.62 5496.06,2681.1 v1(5515.74,2661.41)
QSPI0_DQ0_3V3: JB.2 U5.20 | length 2356.7
  Top Layer w5.91: v1(5437,3468.5) 5437,3409.45 5523.62,3322.83 U5.20
  Mid-Layer 1 w5.91: JB.2@3949.6,2079.92 3999.6,2129.92 3999.6,2227.95 4039.37,2267.72 4137.79,2267.72 5338.57,3468.5 v1(5437,3468.5)
QSPI0_DQ1_1V8: CN1.221 U5.2 | length 806.5
  Top Layer w5.91: v1(5496.05,3094.48) 5539.36,3137.79 U5.2@5539.36,3196.84 ; v1(5555.11,2661.41) 5579.71,2636.82 CN1.221
  Bottom Layer w5.91: v1(5496.05,3094.48) 5496.05,2720.47 v1(5555.11,2661.41)
QSPI0_DQ1_3V3: JB.6 U5.19 | length 2044.1
  Top Layer w5.91: v1(5535.43,3350.39) 5539.36,3346.46 U5.19@5539.36,3267.71
  Mid-Layer 1 w5.91: JB.6@4149.6,2079.92 4196.85,2127.16 4196.85,2208.66 5338.58,3350.39 v1(5535.43,3350.39)
QSPI0_DQ2_1V8: CN1.223 U5.3 | length 796.7
  Top Layer w5.91: v1(5525.58,3094.48) 5555.11,3124.01 U5.3 ; CN1.223 v1(5599.4,2661.41)
  Bottom Layer w5.91: v1(5525.58,3094.48) 5525.58,2735.24 v1(5599.4,2661.41)
QSPI0_DQ3_1V8: CN1.225 U5.4 | length 799.2
  Top Layer w5.91: v1(5555.11,3094.48) 5570.86,3110.23 U5.4@5570.86,3196.84 ; CN1.225 5619.08,2646.64 v1(5633.85,2661.41)
  Bottom Layer w5.91: v1(5555.11,3094.48) 5555.11,2759.84 5633.85,2681.1 v1(5633.85,2661.41)
QSPI0_SCLK_1V8: CN1.229 U5.8 | length 776.3
  Top Layer w5.91: U5.8 5633.85,3124.01 v1(5663.38,3094.48) ; CN1.229 5658.45,2548.22 v1(5673.22,2562.99)
  Bottom Layer w5.91: v1(5663.38,3094.48) 5673.2,3084.62 v1(5673.22,2562.99)
QSPI0_SCLK_3V3: JB.1 U5.13 | length 2473.2
  Top Layer w5.91: v1(5614.17,3468.5) 5633.85,3448.82 U5.13
  Mid-Layer 1 w5.91: JB.1@3949.6,2179.92 3950,2238.22 4020,2307.12 4118,2307.12 5318.8,3507.82 5574.8,3507.82 v1(5614.17,3468.5)
R1_1: R1.1 R2.2 U1.7 | length 151.6
  Top Layer w9.84: R1.1 R2.2 6408.45,2952.44 U1.7@6408.45,2897.43
R5_1: Q1.1 R5.1 U1.5 | length 469
  Top Layer w9.84: R5.1 6364.84,2658.77 6381.88,2641.73 6452.74,2641.73 Q1.1 6498.02,2738.18 6519.68,2759.84 6519.68,2877.95 6500.19,2897.43 U1.5@6459.65,2897.43
RESET_1V8: CN1.239 U5.10 | length 791.8
  Top Layer w5.91: U5.10@5665.35,3196.84 5665.35,3161.41 v1(5732.28,3094.48) ; v1(5732.28,2543.3) 5756.88,2518.7 CN1.239
  Bottom Layer w5.91: v1(5732.28,2543.3) v1(5732.28,3094.48)
RESET_3V3: JD.6 U5.11 | length 1431.5
  Top Layer w5.91: U5.11@5665.35,3267.7 5665.35,3322.83 v1(5673.22,3330.7)
  Bottom Layer w5.91: v1(5673.22,3330.7) 5899.6,3104.32 5899.6,2134.84 5949.6,2084.84 JD.6@5949.6,2079.92
S$6781: 
SPI1_CS_1V8: CN1.95 U3.10 | length 824.4
  Top Layer w5.91: U3.10 4090.5,3151.52 v1(4147.63,3094.48) ; v1(4255.9,2582.67) 4260.81,2577.76 CN1.95
  Bottom Layer w5.91: v1(4147.63,3094.48) 4147.63,2690.94 v1(4255.9,2582.67)
SPI1_MISO_1V8: CN1.93 U3.9 | length 822.8
  Top Layer w5.91: U3.9 4074.8,3137.79 v1(4118.11,3094.48) ; v1(4236.22,2543.3) 4241.13,2538.39 CN1.93
  Bottom Layer w5.91: v1(4118.11,3094.48) 4118.11,2661.41 v1(4236.22,2543.3)
SPI1_MOSI_1V8: CN1.89 U3.7 | length 819.6
  Top Layer w5.91: U3.7 4043.3,3110.23 v1(4059.05,3094.48) ; v1(4157.48,2543.3) 4201.76,2499.02 CN1.89@4201.76,2442.91
  Bottom Layer w5.91: v1@4059.05,3094.48 4059.05,2641.73 v1(4157.48,2543.3)
SPI1_SCLK_1V8: CN1.91 U3.8 | length 821.2
  Top Layer w5.91: U3.8@4059.05,3196.84 4059.05,3124.01 v1(4088.58,3094.48) ; v1(4196.85,2543.3) 4221.44,2518.71 CN1.91
  Bottom Layer w5.91: v1(4088.58,3094.48) 4088.58,2651.57 v1(4196.85,2543.3)
SYS_CLK_EXT_1V8: CN1.214 U4.10 | length 1035.2
  Top Layer w5.91: U4.10@4720.47,3196.84 4720.47,3161.41 4826.77,3055.11 5299.2,3055.11 5510.82,2843.5 CN1.214
SYS_CLK_EXT_3V3: JC.1 U4.11 | length 1230.8
  Top Layer w5.91: U4.11@4720.47,3267.71 4720.47,3288.39 4743.1,3311.02 v1(4748.03,3311.02)
  Bottom Layer w5.91: v1(4748.03,3311.02) 4849.6,3209.45 JC.1@4849.6,2179.92
TL_CLK_1V8: CN1.12 U2.3 | length 490.2
  Top Layer w5.91: CN1.12@3443.9,2765.72 3443.9,2892.72 3586.6,3035.42 U2.3
TL_CLK_3V3: JA.1 U2.18 | length 1554.3
  Top Layer w5.91: v1(3527.56,3389.76) 3586.61,3330.71 U2.18
  Bottom Layer w5.91: JA.1@3049.6,2179.92 3049.6,2911.8 v1(3527.56,3389.76)
TL_IN_DAT_1V8: CN1.6 U2.2 | length 508.2
  Top Layer w5.91: CN1.6@3384.8,2765.72 3384.8,2892.72 3570.9,3078.72 U2.2@3570.9,3196.82
TL_IN_DAT_3V3: JA.4 U2.19 | length 1588.9
  Top Layer w5.91: v1(3527.56,3360.23) 3570.86,3316.93 U2.19@3570.86,3267.72
  Bottom Layer w5.91: JA.4@3149.6,2079.92 3149.6,2084.62 3099.4,2134.82 3099.4,2932.07 v1(3527.56,3360.23)
TL_IN_RDY_1V8: CN1.60 U2.8 | length 535.1
  Top Layer w5.91: U2.8 3665.3,3094.52 3916.3,2843.52 CN1.60@3916.3,2765.72
TL_IN_RDY_3V3: JA.8 U2.13 | length 1581.1
  Top Layer w5.91: U2.13@3665.35,3267.72 3665.35,3320.86 v1(3704.72,3360.23)
  Bottom Layer w5.91: JA.8@3349.6,2079.92 3349.6,2084.82 3399.6,2134.82 3399.6,2356.32 3488.2,2444.92 3488.2,2922.22 3758.9,3192.92 3758.9,3306.12 v1(3704.72,3360.23)
TL_IN_VAL_1V8: CN1.48 U2.7 | length 492.7
  Top Layer w5.91: U2.7 3649.6,3070.82 3798.2,2922.22 CN1.48@3798.2,2765.72
TL_IN_VAL_3V3: JA.6 U2.14 | length 1551.6
  Top Layer w5.91: U2.14 3649.61,3344.49 v1(3665.35,3360.23)
  Bottom Layer w5.91: JA.6@3249.6,2079.92 3301.2,2131.52 3301.2,2415.32 3379.92,2494.04 3379.92,3005.84 3665.35,3291.27 v1(3665.35,3360.23)
TL_OUT_DAT_1V8: CN1.5 U2.1 | length 830.5
  Top Layer w5.91: CN1.5 3374.99,2548.21 v1(3409.45,2582.67) ; v1(3409.45,2976.37) 3555.12,3122.04 U2.1
  Bottom Layer w5.91: v1(3409.45,2582.67) v1(3409.45,2976.37)
TL_OUT_DAT_3V3: JA.3 U2.20 | length 1381.7
  Top Layer w5.91: v1(3527.56,3330.7) 3555.11,3303.14 U2.20
  Bottom Layer w5.91: JA.3@3149.6,2179.92 3149.6,2952.74 v1(3527.56,3330.7)
TL_OUT_RDY_1V8: CN1.66 U2.9 | length 553
  Top Layer w5.91: U2.9 3681.1,3118.12 3975.4,2823.82 CN1.66@3975.4,2765.72
TL_OUT_RDY_3V3: JA.7 U2.12 | length 1370.6
  Top Layer w5.91: U2.12 3681.09,3307.07 v1(3704.72,3330.7)
  Bottom Layer w5.91: JA.7@3349.6,2179.92 3349.6,2385.03 3448.81,2484.25 3448.81,3015.74 3704.72,3271.65 v1(3704.72,3330.7)
TL_OUT_VAL_1V8: CN1.42 U2.4 | length 487.8
  Top Layer w5.91: U2.4@3602.4,3196.82 3602.4,2960.62 3739.2,2823.82 CN1.42@3739.2,2765.72
TL_OUT_VAL_3V3: JA.5 U2.17 | length 1508.7
  Top Layer w5.91: v1(3566.93,3389.76) 3602.35,3354.34 U2.17@3602.35,3267.72
  Bottom Layer w5.91: JA.5@3249.6,2179.92 3212.6,2216.92 3212.6,2976.42 3566.93,3330.75 v1(3566.93,3389.76)
UART0_RX_1V8: CN1.101 U4.8 | length 1119.2
  Top Layer w5.91: CN1.101 4319.87,2489.17 4374.01,2543.3 v1(4708.66,2543.3) ; U4.8@4688.97,3196.84 4688.97,3074.8 v1(4708.66,3055.11)
  Bottom Layer w5.91: v1(4708.66,2543.3) v1(4708.66,3055.11)
UART0_RX_3V3: JD.7 U4.13 | length 2105.8
  Top Layer w5.91: U4.13@4689,3267.72 4689,3311.02 4826.8,3448.82 v1@4984.3,3448.82
  Mid-Layer 2 w5.91: v1@4984.3,3448.82 6049.6,2383.42 JD.7@6049.6,2179.92
  other v1: 4984.25,3448.81
UART0_TX_1V8: CN1.99 U4.7 | length 1081.4
  Top Layer w5.91: CN1.99 4300.18,2508.85 4374.01,2582.67 v1(4669.29,2582.67) ; v1(4669.29,3055.11) 4673.22,3059.04 U4.7
  Bottom Layer w5.91: v1(4669.29,2582.67) v1(4669.29,3055.11)
UART0_TX_3V3: JD.8 U4.14 | length 2227.7
  Top Layer w5.91: U4.14 4673.2,3319.92 4841.5,3488.22 v1(4885.82,3488.18)
  Mid-Layer 2 w5.91: v1(4885.82,3488.18) 4890.75,3488.18 5998.02,2380.9 5998.02,2131.5 JD.8@6049.6,2079.92
pads on no net: CN1. CN1.9 CN1.11 CN1.15 CN1.16 CN1.17 CN1.18 CN1.21 CN1.22 CN1.23 CN1.24 CN1.27 CN1.28 CN1.29 CN1.30 CN1.33 CN1.34 CN1.35 CN1.36 CN1.52 CN1.53 CN1.54 CN1.57 CN1.59 CN1.63 CN1.65 CN1.69 CN1.70 CN1.71 CN1.72 CN1.75 CN1.76 CN1.77 CN1.78 CN1.81 CN1.82 CN1.83 CN1.84 CN1.88 CN1.90 CN1.92 CN1.94 CN1.96 CN1.97 CN1.98 CN1.100 CN1.103 CN1.104 CN1.105 CN1.106 CN1.108 CN1.109 CN1.110 CN1.111 CN1.112 CN1.114 CN1.115 CN1.116 CN1.117 CN1.120 CN1.121 CN1.122 CN1.123 CN1.127 CN1.128 CN1.130 CN1.131 CN1.133 CN1.134 CN1.136 CN1.137 CN1.139 CN1.140 CN1.142 CN1.143 CN1.145 CN1.148 CN1.149 CN1.150 CN1.151 CN1.154 CN1.155 CN1.156 CN1.157 CN1.160 CN1.161 CN1.162 CN1.163 CN1.166 CN1.167 CN1.168 CN1.169 CN1.172 CN1.173 CN1.174 CN1.175 CN1.178 CN1.179 CN1.180 CN1.181 CN1.182 CN1.183 CN1.184 CN1.186 CN1.188 CN1.190 CN1.192 CN1.193 CN1.194 CN1.195 CN1.196 CN1.197 CN1.198 CN1.199 CN1.202 CN1.203 CN1.204 CN1.205 CN1.206 CN1.207 CN1.208 CN1.209 CN1.211 CN1.212 CN1.213 CN1.215 CN1.216 CN1.218 CN1.220 CN1.222 CN1.224 CN1.226 CN1.228 CN1.230 CN1.232 CN1.233 CN1.234 CN1.235 CN1.236 CN1.237 CN1.238 JB.3 JB.4 JB.7 JB.8 JC.3 JC.7 U3.11 U3.12 U3.13 U3.14 U5.17 U5.18

## Polygon pours and split planes (outlines as drawn)
GND on Bottom Layer "Bottom Layer-GND" (solid, pour order 0): 2444.88,4019.68 2444.88,1500 8114.16,1500 8114.16,4019.68
3V3 on Mid-Layer 2 "Mid-Layer 2-3V3" (solid, pour order 1): 2129.92,4019.68 2129.92,1500 7799.2,1500 7799.2,4019.68
1V8 on Top Layer "Top Layer-1V8" (solid, pour order 2): 5870.07,2523.62 5870.07,2326.77 6224.4,2326.77 6224.4,2661.41 6066.92,2661.41 6066.92,2523.62
3V3 on Top Layer "Top Layer-3V3" (solid, pour order 3): 5870.07,2897.64 5870.07,2720.47 5988.18,2720.47 5988.18,2759.84 6440.94,2759.84 6440.94,2799.21 6342.51,2799.21 6342.51,2818.89 5988.18,2818.89 5988.18,2897.64
GND on Top Layer "Top Layer-GND" (solid, pour order 4): 1500,4019.68 1500,1500 7169.28,1500 7169.28,4019.68
GND on Mid-Layer 1 "Mid-Layer 1-GND" (solid, pour order 5): 1814.96,4019.68 1814.96,1500 7484.24,1500 7484.24,4019.68

## Silkscreen, mask and mechanical layers (free items; w line width, h text height)
Top Overlay:
  text "UC Berkeley EE 194" at 4984.24,3074.8 h47.24 r359
  text "2023-01-18" at 4984.24,3015.75 h47.24
  text "SODIMM IO Level 1.8V" at 4984.24,2937.01 h47.24
  text "JLCJLCJLCJLC" at 5181.1,2543.3 h55.12
  text "Rev1" at 2956.69,2272.64 h55.12 r89
  text "EE194 Bringup" at 2759.84,2267.71 h157.48 r87
  text "CARRIER BOARD - Arty PMod" at 2877.95,2267.71 h78.74 r90

## Text inside footprints (layer, text, board x,y; h text height)
CN1: Top Overlay "DDR4" at 3566.9,2641.76 h39.37 r180; Top Overlay "DATE CODE" at 4757.85,2641.76 h39.37 r180; Top Overlay "FOXCONN" at 5929.11,2641.76 h39.37 r180